# Altium PCB Auto_Follower_Controller.PcbDoc
Units mil, origin at the board's own origin, x right, y up, seen from the top; angles counter-clockwise.
Board outline 4527.56 x 2913.39 mil, 2 copper layers (Top Layer, Bottom Layer); 41 components, 39 nets, 157 pads, 22 vias.
Unrouted connection lines stored in the file: 23.
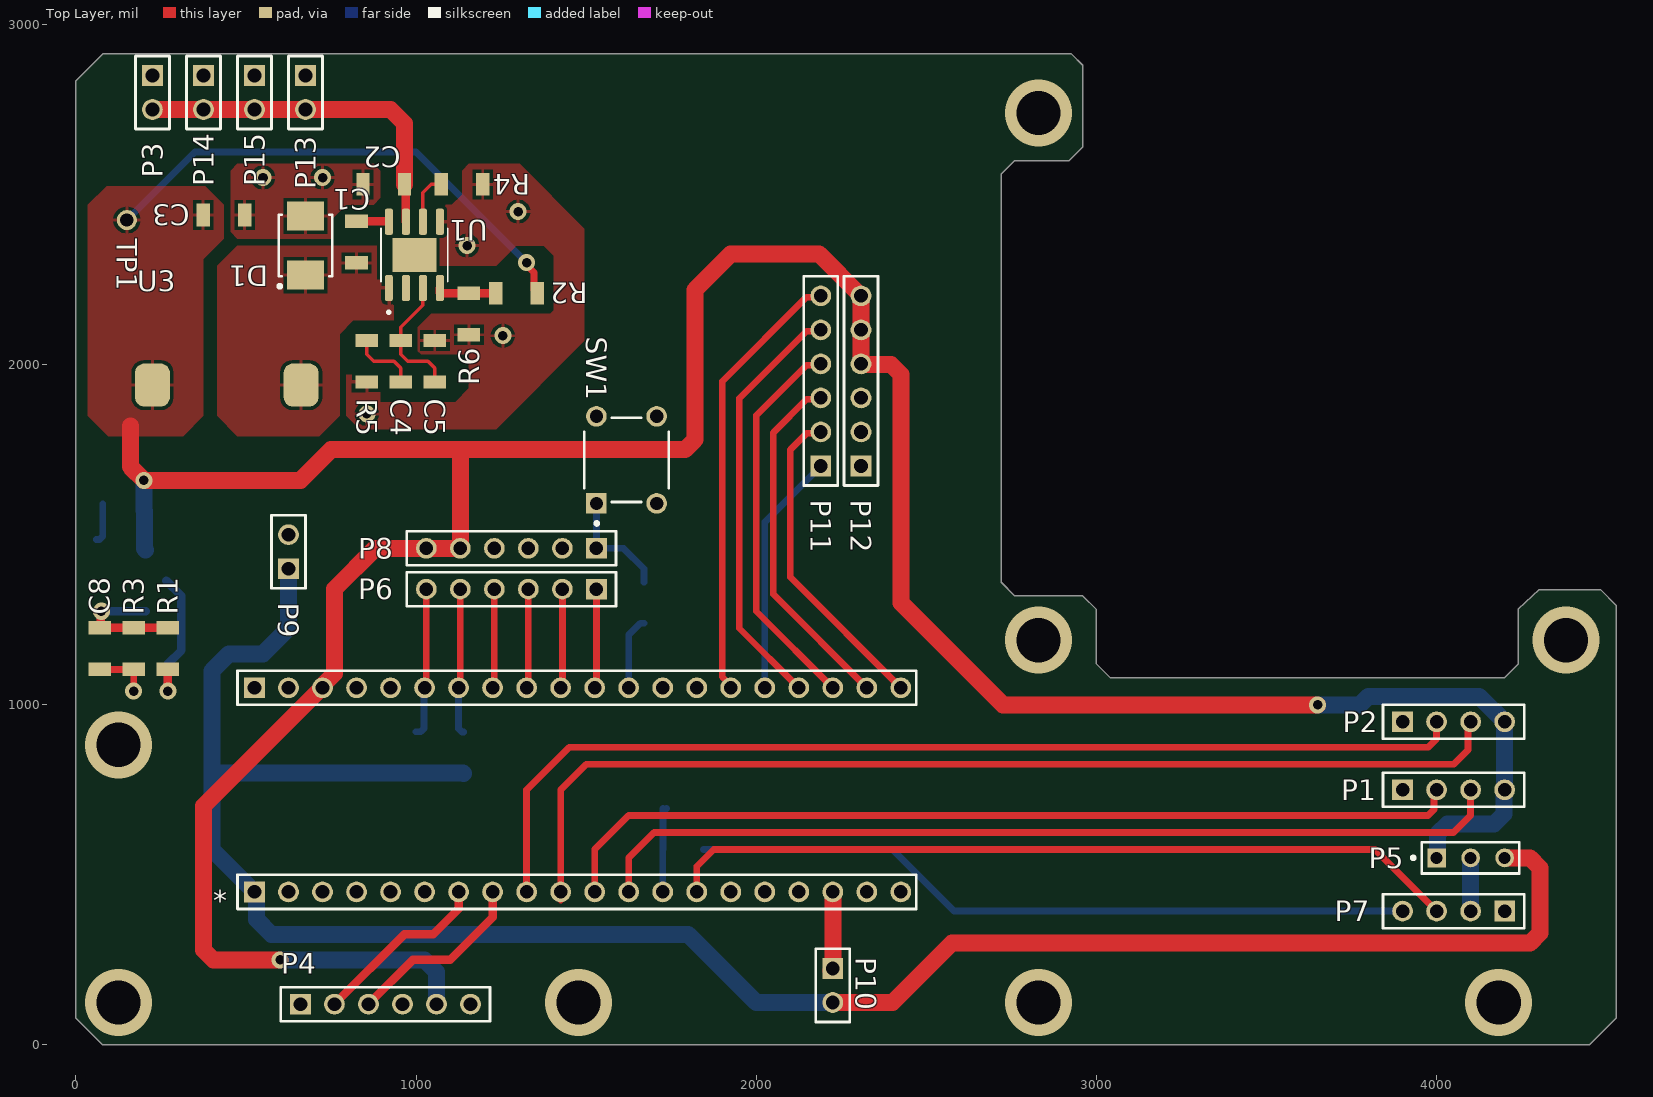
[diagram p0: Top Layer view]
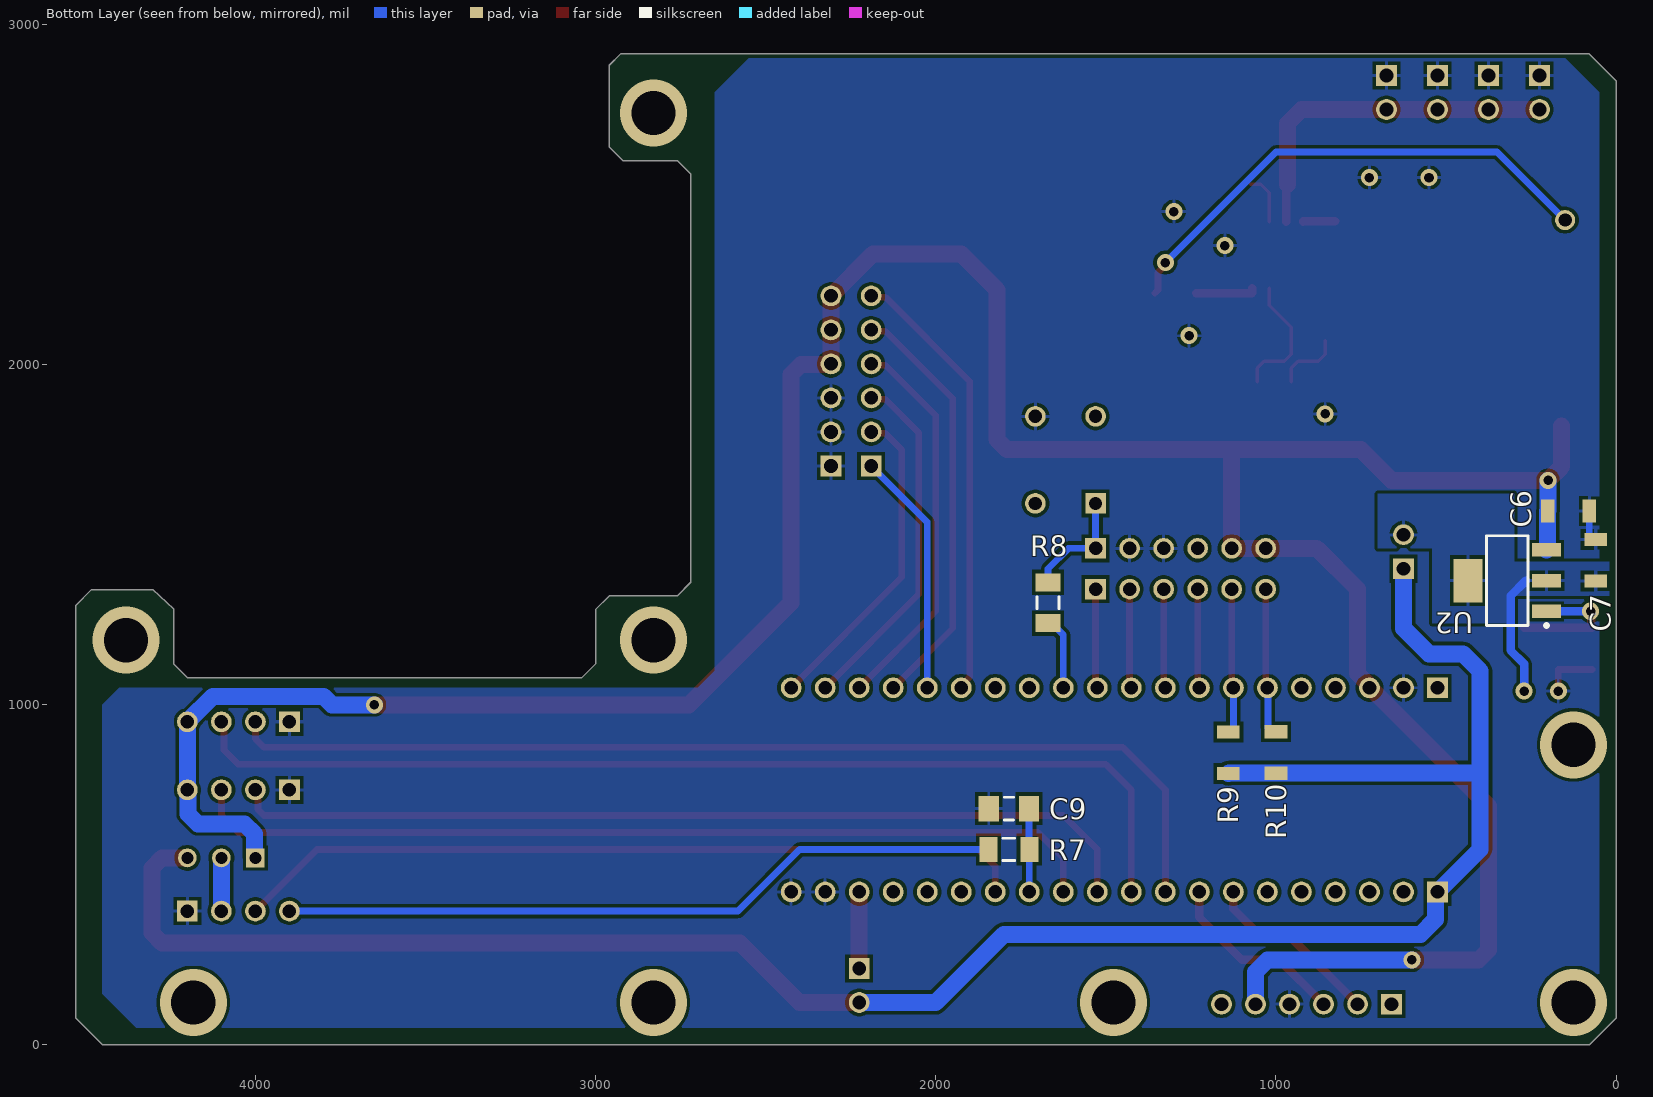
[diagram p1: Bottom Layer view, seen from below]
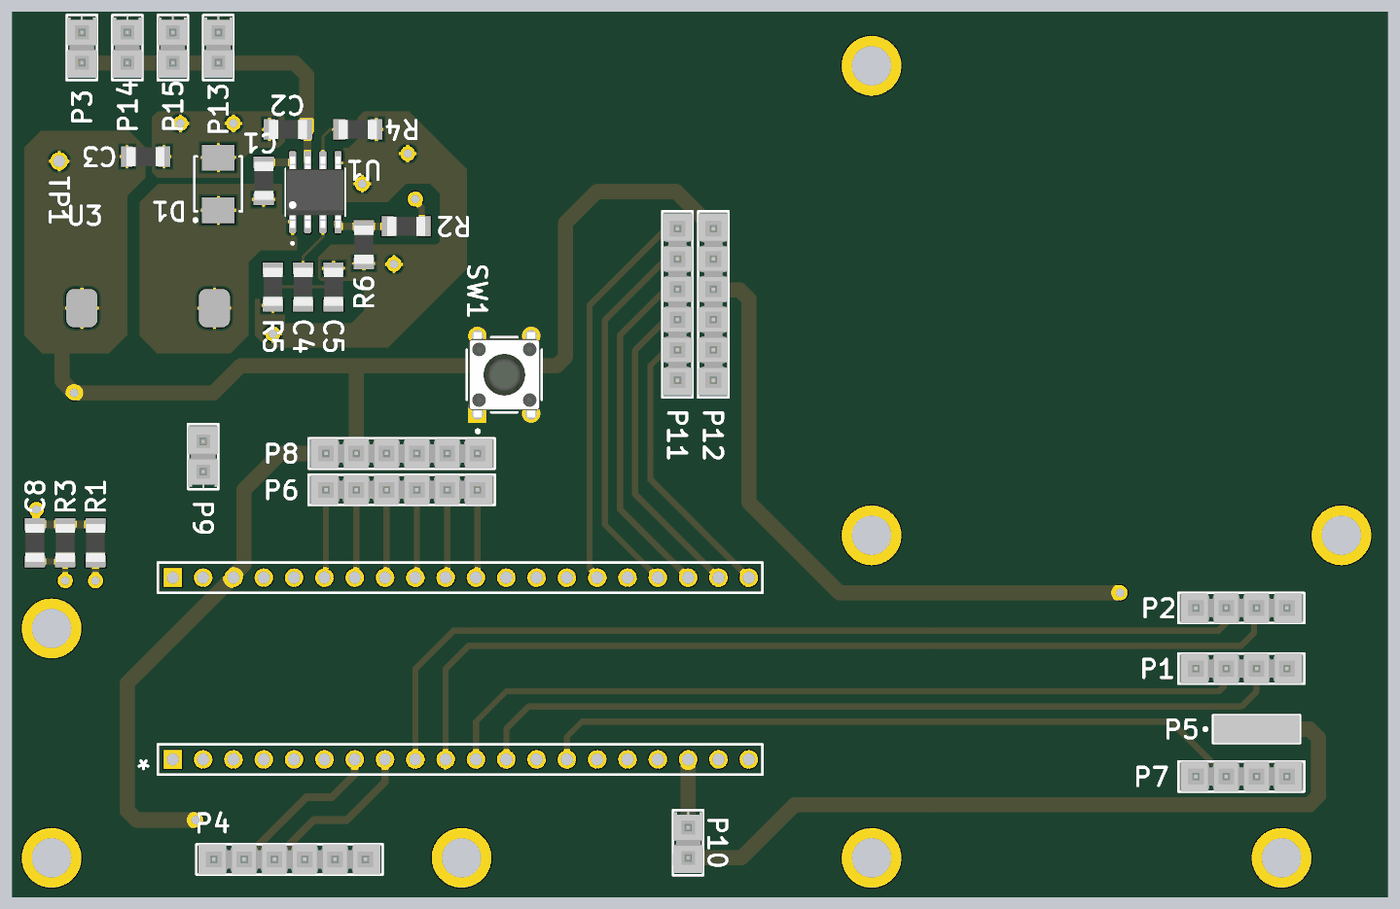
[diagram p2: 3D render of the assembled board from above, using the file's embedded part models]
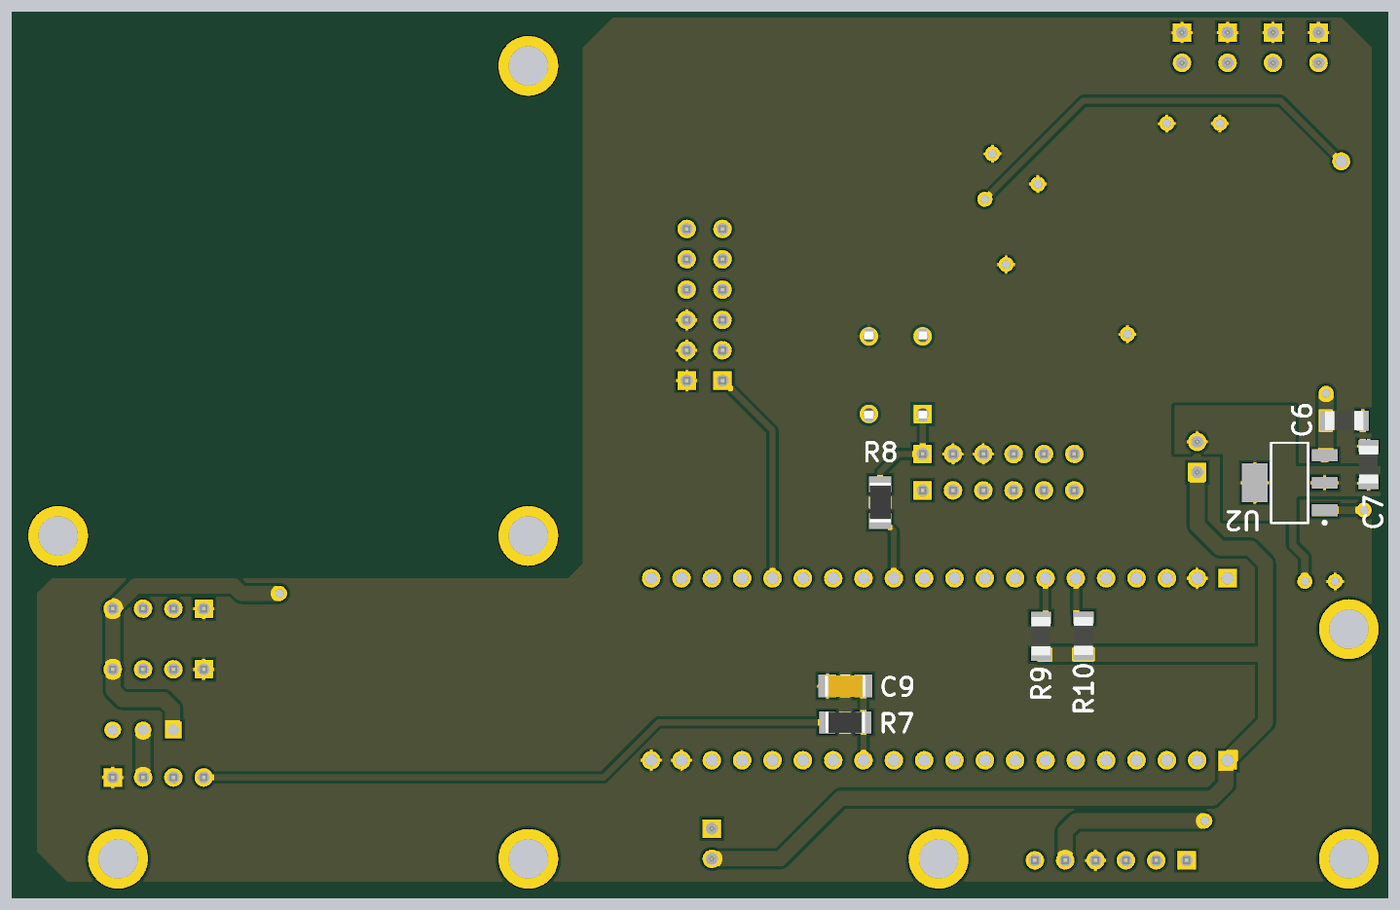
[diagram p3: 3D render of the assembled board from below, using the file's embedded part models]

## Layer stack, top to bottom
Top Solder: solder mask 0.4, Solder Resist, Dk 3.5
Top Layer: signal copper 1.4
Dielectric 1: dielectric 12.6, FR-4, Dk 4.8
Bottom Layer: signal copper 1.4
Bottom Solder: solder mask 0.4, Solder Resist, Dk 3.5

## Board outline
2760,2600 2720,2560 2720,1360 2760,1320 2960,1320 3000,1280 3000,1120 3040,1080 4200,1080 4240,1120 4240,1281.42 4301.52,1338.58 4481.42,1338.58 4527.56,1292.44 4527.56,78.74 4448.82,0 78.74,0 0,78.74 0,2834.65 78.74,2913.39 2926.61,2913.39 2960,2880 2960,2640 2920,2600

## Design rules (kind name [scope] priority, off if disabled: settings)
Clearance [All] p1: gap=10 ignorepadtopadclearanceinfootprint=TRUE except(0: Arc-Hole Track-Hole SMDPad-Hole THPad-Hole Via-Hole Fill-Hole Poly-Hole Region-Hole Text-Hole; 5: Arc-Arc Arc-Track Arc-SMDPad Track-Track Track-SMDPad)
PolygonConnect [All] p1: connectstyle=Relief reliefconductorwidth=10 reliefentries=4 polygonreliefangle="90 Angle" airgapwidth=10
RoutingVias [All] p1: holewidth=28 width=50 viastyle="Through Hole" minholewidth=28 minwidth=50 maxholewidth=100 maxwidth=200
SolderMaskExpansion [All] p1: expansion=4 istentingtop=FALSE
Width [All] p1: maxlimit=100 minlimit=10 preferedwidth=10
30 further rules are at their usual default settings.

## Classes and differential pairs
component class STM32_Interfaces: C9 R7
component class STM32: * P10 R9 R10
component class Connectors: P1 P2 P3 P4 P5 P6 P7 P8 P11 P12 P13 P14 P15 R8 SW1
component class Power_Tree: C1 C2 C3 C4 C5 C6 C7 C8 D1 P9 R1 R2 R3 R4 R5 R6 TP1 U1 U2 U3

## Components (designator, comment, footprint, x,y, rotation, side; value= is the part's Value field where it differs from the comment)
* "STM32-Blue-Pill-Dev" STM32-Blue-Pill-Dev-Headers 525,450 r0 top locked
C1 "100nF 1206" FOOTPRINT-1206-GEN 825,2360 r90 top value=100nF
C2 "CL31B475KBHVPNE" FOOTPRINT-1206-GEN 905,2530 r0 top value=4.7uF
C3 "" FOOTPRINT-1206-GEN 435,2440 r180 top value=33uF
C4 "" FOOTPRINT-1206-GEN 955,2010 r90 top value=33uF
C5 "DNP" FOOTPRINT-1206-GEN 1055,2010 r270 top
C6 "" FOOTPRINT-1206-GEN 140,1570 r0 bottom value=10uF
C7 "" FOOTPRINT-1206-GEN 60,1425 r270 bottom value=10uF
C8 "" FOOTPRINT-1206-GEN 70,1165 r90 top value=6.6uF
C9 "Capacitor 10 uF +/- 10% 16 V 1206" CAPC3216X180X50ML20T25 1785,695 r180 bottom value=10µF
D1 "CMSH3-100 TR13" ONSC-SMB-2-403A-03_V 675,2350 r90 top
P1 "TSW-104-08-T-S" SMTC-TSW-104-08-X-S 3900,750 r0 top
P2 "TSW-104-08-T-S" SMTC-TSW-104-08-X-S 3900,950 r0 top
P3 "TSW-102-26-F-S" SMTC-TSW-102-26-XX-S 225,2850 r270 top
P4 "TSW-106-23-G-S" SMTC-TSW-106-23-X-S 660,120 r0 top
P5 "87224-3" TECO-87224-3_V 4100,550 r0 top
P6 "TSW-106-23-G-S" SMTC-TSW-106-23-X-S 1530,1340 r180 top
P7 "TSW-104-08-T-S" SMTC-TSW-104-08-X-S 4200,393.49 r180 top
P8 "TSW-106-23-G-S" SMTC-TSW-106-23-X-S 1530,1460 r180 top
P9 "TSW-102-26-F-S" SMTC-TSW-102-26-XX-S 625,1400 r90 top
P10 "TSW-102-26-F-S" SMTC-TSW-102-26-XX-S 2225,225 r270 top
P11 "TSW-106-23-G-S" SMTC-TSW-106-23-X-S 2189.76,1702.13 r90 top
P12 "TSW-106-23-G-S" SMTC-TSW-106-23-X-S 2307.87,1702.13 r90 top
P13 "TSW-102-26-F-S" SMTC-TSW-102-26-XX-S 675,2850 r270 top
P14 "TSW-102-26-F-S" SMTC-TSW-102-26-XX-S 375,2850 r270 top
P15 "TSW-102-26-F-S" SMTC-TSW-102-26-XX-S 525,2850 r270 top
R1 "Resistor 250 +/-1% 1206 1/4W" FOOTPRINT-1206-GEN 270,1165 r270 top value=250
R2 "Resistor 52.5k +/-1% 1206 1/4W" FOOTPRINT-1206-GEN 1295,2210 r0 top value=52.5k
R3 "Resistor 150 +/-1% 1206 1/4W" FOOTPRINT-1206-GEN 170,1165 r90 top value=150
R4 "Resistor 200k +/-1% 1206 1/4W" FOOTPRINT-1206-GEN 1135,2530 r180 top value=200k
R5 "Resistor 47.5k +/-1% 1206 1/4W" FOOTPRINT-1206-GEN 855,2010 r90 top value=47.5k
R6 "Resistor 10k +/-1% 1206 1/4W" FOOTPRINT-1206-GEN 1155,2148.98 r90 top value=10k
R7 "Resistor 0R +/- 5% 1206 250 mW" RESC3216X60X45ML15T20 1785,575 r180 bottom value=0
R8 "Resistor 0R +/- 5% 1206 250 mW" RESC3216X60X45ML15T20 1670,1300 r270 bottom value=0
R9 "Resistor 200k +/-1% 1206 1/4W" FOOTPRINT-1206-GEN 1140,858.98 r270 bottom value=4.7k
R10 "Resistor 200k +/-1% 1206 1/4W" FOOTPRINT-1206-GEN 1000,860 r270 bottom value=4.7k
SW1 "3-1825910-1" FP-3-1825910-1-MFG 1618.58,1720 r90 top
TP1 "P5V-TP" FOOTPRINT-GENERIC-TP-VIA-1MM 150,2425 r180 top
U1 "MPQ4558" SOIC127P601X173-9N 995,2322.56 r90 top
U2 "NCP1117GTA" SOT230P700X180-4N 320,1365 r0 bottom
U3 "SLF12565T-150M4R2-PF" "0.492\" X 0.492\"" 662.01,1940 r180 top

## Footprints (in the part's own frame and the unit in brackets; to place one, negate y for a bottom-side part, rotate by r counter-clockwise, add the part's x,y. Pads: shape width x height; smd on the part's side, far side on the other; paste and mask are expansions set on the pad)
"0.492\" X 0.492\"" [mm]
  rrect50% 2.6x3.2 smd: 1(0,0) 2(11.1,0)
  body extent -0.75,-6.25 11.75,6.25, height 6.5
CAPC3216X180X50ML20T25 [mm] "Chip Capacitor, 2-Leads, Body 3.40x1.80mm, IPC Low Density"
  rect 1.5x1.9 smd: 1(-1.5,0) 2(1.5,0)
  silkscreen extent -0.35,-0.85 0.35,0.85, body extent -1.7,-0.9 1.7,0.9, height 1.8
FOOTPRINT-1206-GEN [mm] "1/4 Watt"
  rect 1x1.7 smd: 1(-1.55,0) 2(1.55,0)
  body extent -1.6,-0.8 1.6,0.8, height 0.71
FOOTPRINT-GENERIC-TP-VIA-1MM [mm]
  round 1.5 / inner round 1.524 / far side round 1.5 hole 1: 1(0,0)
FP-3-1825910-1-MFG [mm]
  rect 1.54x1.54 hole 0.99 paste-1000 mask+0: 1(-3.25,2.25)
  round 1.54 hole 0.99 paste-1000 mask+0: 2(3.25,2.25) 3(-3.25,-2.25) 4(3.25,-2.25)
  silkscreen extent -4.87,-3.15 3.15,3.15, body extent -4.12,-3.24 4.12,3.24, height 0.25
ONSC-SMB-2-403A-03_V [mil] "Molded, 2-Leads, Body 4.6x3.95mm"
  rect 85x107.99 smd: 1(-87.01,0) 2(87.01,0)
  silkscreen extent -125,-79 91,81, body extent -91,-78 91,78, height 97
RESC3216X60X45ML15T20 [mm] "Chip Resistor, 2-Leads, Body 3.3x1.75mm, IPC Low Density"
  rect 1.35x1.85 smd: 1(-1.525,0) 2(1.525,0)
  silkscreen extent -0.45,-0.82 0.45,0.82, body extent -1.65,-0.87 1.65,0.87, height 0.6
SMTC-TSW-102-26-XX-S [mm] ".025 SQ Post Terminal Strip Assembly, 1x2 Pins, Vertical, 2.54mm Pitch, Male"
  rect 1.55x1.55 hole 1.02: 1(0,0)
  round 1.55 hole 1.02: 2(2.54,0)
  silkscreen extent -1.46,-1.27 4,1.27, body extent -1.4,-1.27 3.81,1.27, height 8.38
SMTC-TSW-104-08-X-S [mm] ".025 SQ Post Terminal Strip Assembly, 1x4 Pins, Vertical, 2.54mm Pitch, Male"
  rect 1.55x1.55 hole 1.02: 1(0,0)
  round 1.55 hole 1.02: 2(2.54,0) 3(5.08,0) 4(7.62,0)
  silkscreen extent -1.46,-1.27 9.08,1.27, body extent -1.27,-1.27 8.89,1.27, height 8.38
SMTC-TSW-106-23-X-S [mm] ".025 SQ Post Terminal Strip Assembly, 1x6 Pins, Vertical, 2.54mm Pitch, Male"
  rect 1.55x1.55 hole 1.02: 1(0,0)
  round 1.55 hole 1.02: 2(2.54,0) 3(5.08,0) 4(7.62,0) 5(10.16,0) 6(12.7,0)
  silkscreen extent -1.46,-1.27 14.16,1.27, body extent -1.27,-1.27 13.97,1.27, height 8.38
SOIC127P601X173-9N [mm]
  rrect52% 1.96x0.6 smd: 1(-2.475,1.905) 2(-2.475,0.635) 3(-2.475,-0.635) 4(-2.475,-1.905) 5(2.475,-1.905) 6(2.475,-0.635) 7(2.475,0.635) 8(2.475,1.905)
  rect 2.55x3.3 smd paste-3: 9(0,0)
  silkscreen extent -4.38,-2.5 2,2.5, body extent -3,-2.45 3,2.45, height 1.7
SOT230P700X180-4N [mm] "SOT223, 4-Leads, Body 6.50x7.00mm (avg), Pitch 2.30mm, IPC Medium Density"
  rect 2.15x1 smd: 1(-2.925,2.3) 2(-2.925,0) 3(-2.925,-2.3)
  rect 2.15x3.25 smd: 4(2.925,0)
  silkscreen extent -3.05,-3.35 1.55,3.47, body extent -3.5,-3.35 3.5,3.35, height 1.8
STM32-Blue-Pill-Dev-Headers [mm]
  rect 1.55x1.55 hole 1.02: 1(0,0) 21(0,15.24)
  round 1.55 hole 1.02: 2(2.54,0) 3(5.08,0) 4(7.62,0) 5(10.16,0) 6(12.7,0) 7(15.24,0) 8(17.78,0) 9(20.32,0) 10(22.86,0) 11(25.4,0) 12(27.94,0) 13(30.48,0) 14(33.02,0) 15(35.56,0) 16(38.1,0) 17(40.64,0) 18(43.18,0) 19(45.72,0) 20(48.26,0) 22(2.54,15.24) 23(5.08,15.24) 24(7.62,15.24) 25(10.16,15.24) 26(12.7,15.24) 27(15.24,15.24) 28(17.78,15.24) 29(20.32,15.24) 30(22.86,15.24) 31(25.4,15.24) 32(27.94,15.24) 33(30.48,15.24) 34(33.02,15.24) 35(35.56,15.24) 36(38.1,15.24) 37(40.64,15.24) 38(43.18,15.24) 39(45.72,15.24) 40(48.26,15.24)
  silkscreen extent -1.27,-1.27 49.4,16.51
TECO-87224-3_V [mm] "THD, 3-Leads, Body 7.21x2.31mm, Pitch 2.54mm"
  rect 1.4x1.4 hole 0.889: 1(-2.54,0)
  round 1.4 hole 0.889: 2(0,0) 3(2.54,0)
  silkscreen extent -4.41,-1.17 3.64,1.17, body extent -3.61,-1.17 3.61,1.17, height 10.36

## Part data
C1: library part CMP-001-00085-2, "CAP CER 100nF 50V X7R 1206 ±10% 50V Ceramic Capacitor X7R 1206 (3216 Metric)", Part Number=1276-6781-1-ND, Design Item ID=Capacitor-Generic-1206, LatestRevisionNote="Re-released for DXP Platform.", PackageDescription="Radial Cap, Thru-Hole; 2 Leads; 0.3 in Pin Spacing", PackageReference=RAD-0.3, Published=8-Jun-2000, Publisher="Altium Limited", Source=Generic.SchLib, Type=Capacitor
C2: library part CMP-001-00085-2, "CAP CER 4.7UF 50V X7R 1206 ±10% 50V Ceramic Capacitor X7R 1206 (3216 Metric)", Part Number=1276-6781-1-ND, Design Item ID=Capacitor-Generic-1206, LatestRevisionNote="Re-released for DXP Platform.", PackageDescription="Radial Cap, Thru-Hole; 2 Leads; 0.3 in Pin Spacing", PackageReference=RAD-0.3, Published=8-Jun-2000, Publisher="Altium Limited", Source=Generic.SchLib, Type=Capacitor
C3 C4: library part CMP-001-00085-2, "CAP CER 33UF 50V X7R 1206 ±10% 50V Ceramic Capacitor X7R 1206 (3216 Metric)", Part Number=1276-6781-1-ND, Design Item ID=Capacitor-Generic-1206, LatestRevisionNote="Re-released for DXP Platform.", PackageDescription="Radial Cap, Thru-Hole; 2 Leads; 0.3 in Pin Spacing", PackageReference=RAD-0.3, Published=8-Jun-2000, Publisher="Altium Limited", Source=Generic.SchLib, Type=Capacitor
C5: library part CMP-001-00085-2, "1206", Part Number=1276-6781-1-ND, Design Item ID=Capacitor-Generic-1206, LatestRevisionNote="Re-released for DXP Platform.", PackageDescription="Radial Cap, Thru-Hole; 2 Leads; 0.3 in Pin Spacing", PackageReference=RAD-0.3, Published=8-Jun-2000, Publisher="Altium Limited", Source=Generic.SchLib, Type=Capacitor
C6 C7: library part CMP-001-00085-2, "CAP CER 10UF 50V X7R 1206 ±10% 50V Ceramic Capacitor X7R 1206 (3216 Metric)", Part Number=1276-6781-1-ND, Design Item ID=Capacitor-Generic-1206, LatestRevisionNote="Re-released for DXP Platform.", PackageDescription="Radial Cap, Thru-Hole; 2 Leads; 0.3 in Pin Spacing", PackageReference=RAD-0.3, Published=8-Jun-2000, Publisher="Altium Limited", Source=Generic.SchLib, Type=Capacitor
C8: library part CMP-001-00085-2, "CAP CER 6.6UF 50V X7R 1206 ±10% 50V Ceramic Capacitor X7R 1206 (3216 Metric)", Part Number=1276-6781-1-ND, Design Item ID=Capacitor-Generic-1206, LatestRevisionNote="Re-released for DXP Platform.", PackageDescription="Radial Cap, Thru-Hole; 2 Leads; 0.3 in Pin Spacing", PackageReference=RAD-0.3, Published=8-Jun-2000, Publisher="Altium Limited", Source=Generic.SchLib, Type=Capacitor
C9: library part CMP-001-00016-4, "Chip Capacitor, 10 uF, +/- 10%, 16 V, 1206 (3216 Metric)", Capacitor Type=Ceramic, Case/Package=1206, Max Operating Temperature=125°C, Min Operating Temperature=-55°C, Tolerance=10%, Voltage Rating=16V, Mounting Technology=SM, Pins=2, RoHS Compliant=True
D1: library part CMP-1055-00373-1, "CMSH3-100 TR13 Schottky Power Rectifier, 2-Pin SMB, Pb-Free, Tape and Reel", Manufacturer="On Semiconductor", PartNumber=SS22T3G, ComponentLink1Description="Manufacturer URL", ComponentLink1URL=http://www.onsemi.com/, ComponentLink2Description=Datasheet, ComponentLink2URL=http://www.onsemi.cn/pub_link/Collateral/SS24-D.PDF, ComponentLink3Description="Package Specification", ComponentLink3URL=http://www.onsemi.com/pub_link/Collateral/403A-03.PDF, Configuration=Single, DatasheetVersion="Rev. 4", IFSM Max (A)=75, Mounting Technology="Surface Mount", PackageDescription="2-Pin Small Molded Package, J-Bend Lead, Body 4.33 x 3.625 mm", PackageReference=SMB-2-403A-03, PackageVersion="Rev. J, 07/2012", Packing="Tape and Reel", RoHS=TRUE
P1 P2 P7: library part CMP-1024-00356-1, "0.025\" SQ Post Header, Through-hole, Vertical, -55 to 105 degC, 2.54 mm Pitch, 4-Pin, Male, RoHS", Manufacturer=Samtec, Temperature Range="-55 to 105 degC", ComponentLink1Description="Manufacturer URL", ComponentLink1URL=http://www.samtec.com, ComponentLink2Description=Datasheet, ComponentLink2URL=http://www.samtec.com/documents/webfiles/pdf/TSW_TH.PDF, ComponentLink3Description="Package Specification", ComponentLink3URL=http://www.samtec.com/documents/webfiles/cpdf/TSW-XXX-XX-XXX-X-XX-XXX-MKT.pdf, DatasheetVersion=F-214, Mounting Technology=Through-hole, Orientation=Vertical, PackageDescription=".025[0.64] SQ. Post Terminal Strip Assembly", PackageReference=TSW-104-08-X-S, PackageVersion="DM, 8/1988", PartNumber=TSW-104-08-T-S, Pitch="2.54 mm", RoHS=True
P3 P9 P10 P13 P14 P15: library part CMP-002-00072-1, "Headers & Wire Housings Classic PCB Header Strips, 0.100 pitch", Flammability Rating="UL94 V-0", Housing Color=Black, Max Current Rating=7.6A, Max Operating Temperature=125°C, Max Voltage Rating (AC)=550V, Min Operating Temperature=-55°C, Package Quantity=1, Voltage Rating=500V, Contact Gender=Male, Contact Material=Bronze, Contact Mating Length=5.84mm, Contact Plating=Gold, Contact Post Length=3.2mm, Contact Type=-, Depth=2.54mm, Gender=Male, Housing Material=Polyester, Length=5.08mm, Number of Contacts=2, Number of Positions=2, Number of Rows=1, Orientation=Vertical, Packaging=Bulk, Pitch=2.54mm, Radiation Hardening=No, REACH SVHC="No SVHC", RoHS Compliant=Yes, Series=TSW, Termination="Through Hole", Weight=0.001257oz
P4 P6 P8 P11 P12: library part CMP-1024-00396-1, "0.025\" SQ Post Header, Through-hole, Vertical, -55 to 125 degC, 2.54 mm Pitch, 6-Pin, Male, RoHS", Manufacturer=Samtec, Temperature Range="-55 to 125 degC", ComponentLink1Description="Manufacturer URL", ComponentLink1URL=http://www.samtec.com, ComponentLink2Description=Datasheet, ComponentLink2URL=http://www.samtec.com/documents/webfiles/pdf/TSW_TH.PDF, ComponentLink3Description="Package Specification", ComponentLink3URL=http://www.samtec.com/documents/webfiles/cpdf/TSW-XXX-XX-XXX-X-XX-XXX-MKT.pdf, DatasheetVersion=F-214, Mounting Technology=Through-hole, Orientation=Vertical, PackageDescription=".025[0.64] SQ. Post Terminal Strip Assembly", PackageReference=TSW-106-23-X-S, PackageVersion="DM, 8/1988", PartNumber=TSW-106-23-G-S, Pitch="2.54 mm", RoHS=True
P5: library part CMP-2000-05697-1, "Male Header, Pitch 2.54 mm, 1 x 3 Position, Height 10.744 mm, Tail Length 3.175 mm, -65 to 105 degC, RoHS, Bulk", Color=Black, Manufacturer="TE Connectivity", Package Description="Male Header, Pitch 2.54 mm, 1 x 3 Position, Height 10.744 mm, Tail Length 3.175 mm", Standard Package=520, 3D Model=87224-3.pdf, Catalog Drawings="SingleSquareStraightPost /  / SingleSquareStraightPostSide", Category=Connectors,Interconnects, Connector Type=Header,Unshrouded, Contact Finish=Gold, Contact Finish Thickness=15µin(0.38µm), Contact Mating Length="0.318\"(8.08mm)", Contact Type=MalePin, Datasheet URL=http://www.te.com/commerce/DocumentDelivery/DDEController?Action=showdoc&DocId=Customer+Drawing%7F87224%7FL3%7Fpdf%7FEnglish%7FENG_CD_87224_L3.pdf%7F87224-3, Datasheet Version="Rev. L3, 08/2015", Dynamic Catalog=AMPMODUModIISeries, Family=RectangularConnectors-Headers,MalePins, Featured Product=AMPMODUConnectors, Manufacturer URL=http://www.te.com/, Mating Products="147738-2-ND / -CONNRCPT3POSVERTSMDGOLD / 147723-2-ND / -CONNRCPT3POSVERT.100GOLD / 146763-5-ND / -CONNRCPT3POSSGLVERT.100T/H / A32904-ND / -CONNRECEPT3POS.100VERTGOLD / A26922-ND / -CONNHOUSING3POS.100LOCKING / A26415-ND / -CONNRECEPT3POS.100VERTAU / A26964-ND / -CONNHOUSING3POS.100SINGLE / A3012-ND / -CONNHOUSING3POS.100SINGLE", Mounting Technology=ThroughHole, Mounting Type=ThroughHole, Number of Positions=3, Number of Positions Loaded=All, Number of Rows=1, Other Names="87224-3-ND / A26545", Package Reference=87224-3, Packaging=Bulk, Pitch="0.100\"(2.54mm)", RoHS Information=87224-3StatementofCompliance, Series=AMPMODUModII, Termination=Solder
R1: library part CMP-009-00204-1, "250 ±1% 0.25W, 1/4W Chip Resistor 1206 (3216 Metric) Automotive AEC-Q200 Thick Film", Design Item ID=Resistor-Generic-1206-3216, Source=Generic.SchLib, Type=Resistor
R2: library part CMP-009-00204-1, "52.5k ±1% 0.25W, 1/4W Chip Resistor 1206 (3216 Metric) Automotive AEC-Q200 Thick Film", Design Item ID=Resistor-Generic-1206-3216, Source=Generic.SchLib, Type=Resistor
R3: library part CMP-009-00204-1, "150 ±1% 0.25W, 1/4W Chip Resistor 1206 (3216 Metric) Automotive AEC-Q200 Thick Film", Design Item ID=Resistor-Generic-1206-3216, Source=Generic.SchLib, Type=Resistor
R4 R9 R10: library part CMP-009-00204-1, "200k ±1% 0.25W, 1/4W Chip Resistor 1206 (3216 Metric) Automotive AEC-Q200 Thick Film", Design Item ID=Resistor-Generic-1206-3216, Source=Generic.SchLib, Type=Resistor
R5: library part CMP-009-00204-1, "47.5k ±1% 0.25W, 1/4W Chip Resistor 1206 (3216 Metric) Automotive AEC-Q200 Thick Film", Design Item ID=Resistor-Generic-1206-3216, Source=Generic.SchLib, Type=Resistor
R6: library part CMP-009-00204-1, "10k ±1% 0.25W, 1/4W Chip Resistor 1206 (3216 Metric) Automotive AEC-Q200 Thick Film", Design Item ID=Resistor-Generic-1206-3216, Source=Generic.SchLib, Type=Resistor
R7 R8: library part CMP-009-00002-4, "Chip Resistor, 0 Ohm, +/- 5%, 0.25 W, -55 to 155 degC, 1206 (3216 Metric)", Case/Package=1206, Max Operating Temperature=155°C, Min Operating Temperature=-55°C, Power=250mW, Tolerance=5%, Voltage Rating=200V, Mounting Technology=SM, Pins=2, RoHS Compliant=True
SW1: library part CMP-03407-000001-1, "SWITCH TACTILE SPST-NO 0.05A 24V", Contact Current Rating=50mA, Contact Resistance=100mΩ, Manufacturer="TE Connectivity", Operating Force=160gf, Package=0, Temperature="-35°C to +85°C", Temperature Range High=+85°C, Temperature Range Low=-35°C, Automotive=No, Category=Switch, ComponentLink2Description=Datasheet, ComponentLink2URL=https://www.te.com/commerce/DocumentDelivery/DDEController?Action=srchrtrv&DocNm=1825910&DocType=Customer+Drawing&DocLang=English, Device Class L1=Electromechanical, Device Class L2=Switches, Device Class L3="Tactile Switches", Digikey Description="SWITCH TACTILE SPST-NO 0.05A 24V", Electromechanical Life=100000Cycles, Height=17.3mm, Lead Free=Yes, Manufacturer Part Number=3-1825910-1, Mount="Through Hole", Octopart=https://octopart.com/3-1825910-1-te+connectivity-46506874, RoHS=TRUE, Throw Configuration=SPST-NO
TP1: library part CMP-025-000000-1, Design Item ID=Misc-Generic-TP, Source=Generic.SchLib
U1: library part CMP-047-000002-2, Design Item ID=MPQ4558, Source=Schlib1.SchLib

## Via types
v1: diameter 50, hole 28, Top Layer to Bottom Layer, 13 vias
v2: diameter 196.85, hole 130, Top Layer to Bottom Layer, 9 vias

## Nets (pads, with @x,y where several pads share a name; then routed paths per layer and width w, separated by ;. In a path a pad name is that pad's centre, name@x,y a point inside that pad or via, vN(x,y) a via of type N, cw(c..) or ccw(c..) an arc to the next point about the centre after c; other vN are vias at no path point)
FB_5V: R2.1 R6.2 U1.4 | length 178.7
  Top Layer w25: U1.4 1070,2210.69 1070.69,2210 R6.2 R2.1
GND: *.19 *.20 *.22 C2.1 C3.1 C5.1 C6.1 C7.1 C8.1 C9.1 D1.2 P1.1 P2.1 P3.1 P4.4 P7.1 P8.2 P8.3 P12.1 P12.2 P12.3 P13.1 P14.1 P15.1 R3.1 R4.1 R5.1 R6.1 SW1.4 U1.5 | length 281.3
  Top Layer w20: C8.1 R3.1 v1(170,1040)
  Bottom Layer w20: C7.1 69.29,1486.02 78.98,1495.71 C6.1@78.98,1590
  other v1: 855,1855 1255,2085 1150,2350 1300,2450 550,2550 725,2550
Net*_9: *.9 P2.2 | length 3087.1
  Top Layer w20: *.9 1325,750 1450,875 3975,875 4000,900 P2.2
Net*_10: *.10 P2.3 | length 3125.6
  Top Layer w20: *.10@1425,426.2 *.10 1425,750 1500,825 4050,825 4092.15,867.15 4092.15,942.15 P2.3
Net*_11: *.11 P1.2 | length 2701.8
  Top Layer w20: *.11 1525,575 1625,675 3975,675 3992.15,692.15 3992.15,742.15 P1.2
Net*_12: *.12 P1.3 | length 2701.8
  Top Layer w20: *.12 1625,550 1700,625 4050,625 4100,675 P1.3
Net*_13: *.13 C9.2 R7.2 | length 256.9
  Bottom Layer w20: *.13 R7.2 1725.45,575.45 1725.45,694.51 C9.2 ; C9.2@1727.85,686.9 C9.2@1735.94,695
Net*_14: *.14 P7.3 | length 2361
  Top Layer w20: *.14@1825,434.86 1825,525 1875,575 3818.49,575 P7.3
Net*_18: *.18 P10.1 | length 228.5
  Top Layer w50: P10.1@2219.49,219.49 P10.1 *.18@2225,445.75
Net*_28: *.28 P6.4 | length 292.1
  Top Layer w20: *.28 1230,1055 P6.4
Net*_29: *.29 P6.3 | length 292.1
  Top Layer w20: *.29 1330,1055 P6.3
Net*_30: *.30 P6.2 | length 292.1
  Top Layer w20: *.30 1430,1055 P6.2
Net*_31: *.31 P6.1 | length 292.1
  Top Layer w20: *.31 1530,1055 P6.1
Net*_32: *.32 R8.2 | length 214.4
  Bottom Layer w20: *.32 1625,1204.8 1660.16,1239.96 R8.2
Net*_35: *.35 P11.6 | length 1304.6
  Top Layer w20: *.35 1925,1057.23 1900,1082.23 1900,1950 2148.16,2198.16 2185.79,2198.16 P11.6
Net*_36: *.36 P11.1 | length 720.4
  Bottom Layer w20: *.36 2025,1537.36 P11.1
Net*_37: *.37 P11.5 | length 1246
  Top Layer w20: *.37 1950,1225 1950,1900 2148.16,2098.16 2185.79,2098.16 P11.5
Net*_38: *.38 P11.4 | length 1146
  Top Layer w20: P11.4 2185.79,1998.16 2148.16,1998.16 2000,1850 2000,1275 *.38
Net*_39: *.39 P11.3 | length 1046
  Top Layer w20: P11.3 2185.79,1898.16 2148.16,1898.16 2050,1800 2050,1325 *.39
Net*_40: *.40 P11.2 | length 946
  Top Layer w20: P11.2 2185.79,1798.16 2148.16,1798.16 2100,1750 2100,1375 *.40
NetC1_1: C1.1 D1.1 U1.1 U3.1
NetC1_2: C1.2 U1.8 | length 95.6
  Top Layer w25: C1.2 919.31,2421.02 920,2420.33 U1.8
NetC4_1: C4.1 R5.2 | length 198.6
  Top Layer w10: R5.2 855,2030 875,2010 935,2010 955,1990 C4.1
NetC4_2: C4.2 C5.2 U1.3 | length 379.6
  Top Layer w10: U1.3 1020,2175 955,2110 C4.2 955,2030 975,2010 1035,2010 1055,1990 C5.2
NetC7_2: C7.2 P9.2 R1.2 U2.2 U2.4 | length 423.6
  Top Layer w25: v1(270,1040) R1.2
  Bottom Layer w25: 265.4,1364.6 310,1320 310,1160 270,1120 v1(270,1040)
NetC8_2: C8.2 R1.1 R3.2 U2.1 | length 381.1
  Top Layer w25: v1(75,1275) 72.5,1272.5 72.5,1228.52 C8.2 R3.2 R1.1
  Bottom Layer w25: v1(75,1275) 75.28,1274.72 204.57,1274.72 U2.1
NetP4_1: P4.1
NetP4_6: P4.6
NetP5_2: P5.2 P7.2 | length 141
  Bottom Layer w50: P7.2 P5.2@4100,534.44
NetP7_4: P7.4 R7.1 | length 2130.1
  Bottom Layer w20: R7.1 2400,575 2581.51,393.49 P7.4
NetP8_1: P8.1 R8.1 SW1.1 | length 336.9
  Bottom Layer w20: SW1.1 P8.1 1610,1460 1670,1400 R8.1
NetR4_2: R4.2 U1.6 | length 149.3
  Top Layer w10: U1.6 1020,2505 1045,2530 R4.2
P3V3: *.1 P5.3 P9.1 P10.2 R9.2 R10.2 | length 6244.7
  Top Layer w50: P10.2 2400,125 2575,300 4275,300 4304.29,329.29 4304.29,520.71 4275,550 P5.3
  Bottom Layer w50: P9.1 625,1225 550,1150 450,1150 400,1100 400,800 ; R9.2 1137.95,800 400,800 ; P10.2 2000,125 1824.95,300.05 1800,325 575,325 530.51,369.49 530.51,444.49 *.1 400,575 400,800
P5V: *.23 C3.2 C6.2 P1.4 P2.4 P4.5 P5.1 P8.5 P8.6 P12.4 P12.5 P12.6 R2.2 TP1.1 U2.3 U3.2 | length 10810.7
  Top Layer w20: v1(1325,2300) 1325,2291.88 1346.34,2270.54 1346.34,2219.69 R2.2
  Top Layer w50: 160,1820 160,1700 v1(200,1660) 660,1660 750,1750 1130,1750 ; v1(600,250) 404.29,250 375,279.29 375,702.98 730.51,1058.49 730.51,1062.86 760,1092.35 760,1340 880,1460 P8.6 P8.5 1130,1750 ; v1(3650,1000) 2725,1000 2425,1300 2425,1970.73 2395.71,2000.02 2309.98,2000.02 P12.4 P12.5 P12.6 2185,2325 1925,2325 1820,2220 1820,1779.29 1790.71,1750 1130,1750
  Bottom Layer w20: TP1.1 350,2625 1000,2625 v1(1325,2300)
  Bottom Layer w50: v1(200,1660) 200,1571.02 C6.2 201.02,1459.37 U2.3 ; v1(600,250) 1025,250 1060,215 P4.5 ; v1(3650,1000) 3775,1000 3800,1025 4125,1025 P2.4 P1.4 4197.89,747.89 4197.89,679.29 4168.6,650 4031.85,650 4002.56,620.71 P5.1@4002.56,550
RX1: *.27 P6.5 R9.1 | length 431.4
  Top Layer w20: *.27 1130,1055 P6.5
  Bottom Layer w20: *.27 1125,929.68 1134.69,920 R9.1
RX2: *.8 P4.3 | length 545.6
  Top Layer w25: P4.3 990,250 1100,250 1225,375 *.8
TX1: *.26 P6.6 R10.1 | length 439.5
  Top Layer w20: *.26 1030,1055 P6.6
  Bottom Layer w20: R10.1 1013.78,921.02 1023.46,930.71 1023.46,1048.46 *.26
TX2: *.7 P4.2 | length 531
  Top Layer w25: P4.2 965,325 1050,325 1125,400 *.7
VBATT: C2.2 P3.2 P13.2 P14.2 P15.2 U1.7 | length 1048.6
  Top Layer w25: C2.2 969.31,2526.71 969.31,2420.69 U1.7
  Top Layer w50: P3.2 P14.2 P15.2 P13.2 925,2750 966.02,2708.98 C2.2
pads on no net: *.2 *.3 *.4 *.5 *.6 *.15 *.16 *.17 *.21 *.24 *.25 *.33 *.34 P8.4 SW1.2 SW1.3 U1.2 U1.9
copper on no net:
  other v2: 125,125 1477.5,125 2830,125 2830,125 4182.5,125 125,882.5 2830,1190 4380,1190 2830,2740

## Polygon pours and split planes (outlines as drawn)
P5V on Top Layer "P5V_L01_P001" (solid, pour order 1): 375,1850 315,1790 95,1790 35,1850 35,2470 90,2525 380,2525 435,2470 435,2370 375,2310 375,2270
GND on Top Layer "GND_L01_P002" (solid, pour order 2): 755,2370 475,2370 455,2390 455,2570 475,2590 875,2590 895,2570 895,2490 875,2470 795,2470 755,2430
NetC1_1 on Top Layer "NETC1_1_L01_P000" (solid, pour order 0): 715,1790 475,1790 415,1850 415,2290 475,2350 885,2350 885,2250 935,2250 935,2130 815,2130 775,2090 775,1850
GND on Top Layer "GND_L01_P003" (solid, pour order 3): 795,1970 895,1970 895,1890 1115,1890 1155,1930 1155,2030 1015,2030 1005,2040 1005,2110 1045,2150 1395,2150 1405,2160 1405,2320 1375,2350 1295,2350 1235,2290 915,2290 915,2360 1045,2360 1045,2470 1105,2470 1135,2500 1135,2570 1155,2590 1305,2590 1495,2400 1495,2070 1235,1810 835,1810 795,1850
NetC7_2 on Bottom Layer "NETC7_2_L02_P006" (solid, pour order 6): 20,1420 20,1320 310,1320 310,1240 540,1240 540,1460 700,1460 700,1620 300,1620 300,1420
GND on Bottom Layer "GND_L02_P007" (solid, pour order 7): 150,2900 50,2800 50,200 200,50 4350,50 4450,150 4450,1000 4400,1050 2700,1050 2650,1100 2650,2800 2550,2900 2450,2900

## Silkscreen, mask and mechanical layers (free items; w line width, h text height)
Outline:
  the board outline again, w10